# Altium PCB Main-Controller-PCB.PcbDoc
Units mm, origin at the board's own origin, x right, y up, seen from the top; angles counter-clockwise.
Board outline 96 x 40 mm, 2 copper layers (Top Layer, Bottom Layer); 19 components, 25 nets, 112 pads, 285 vias.
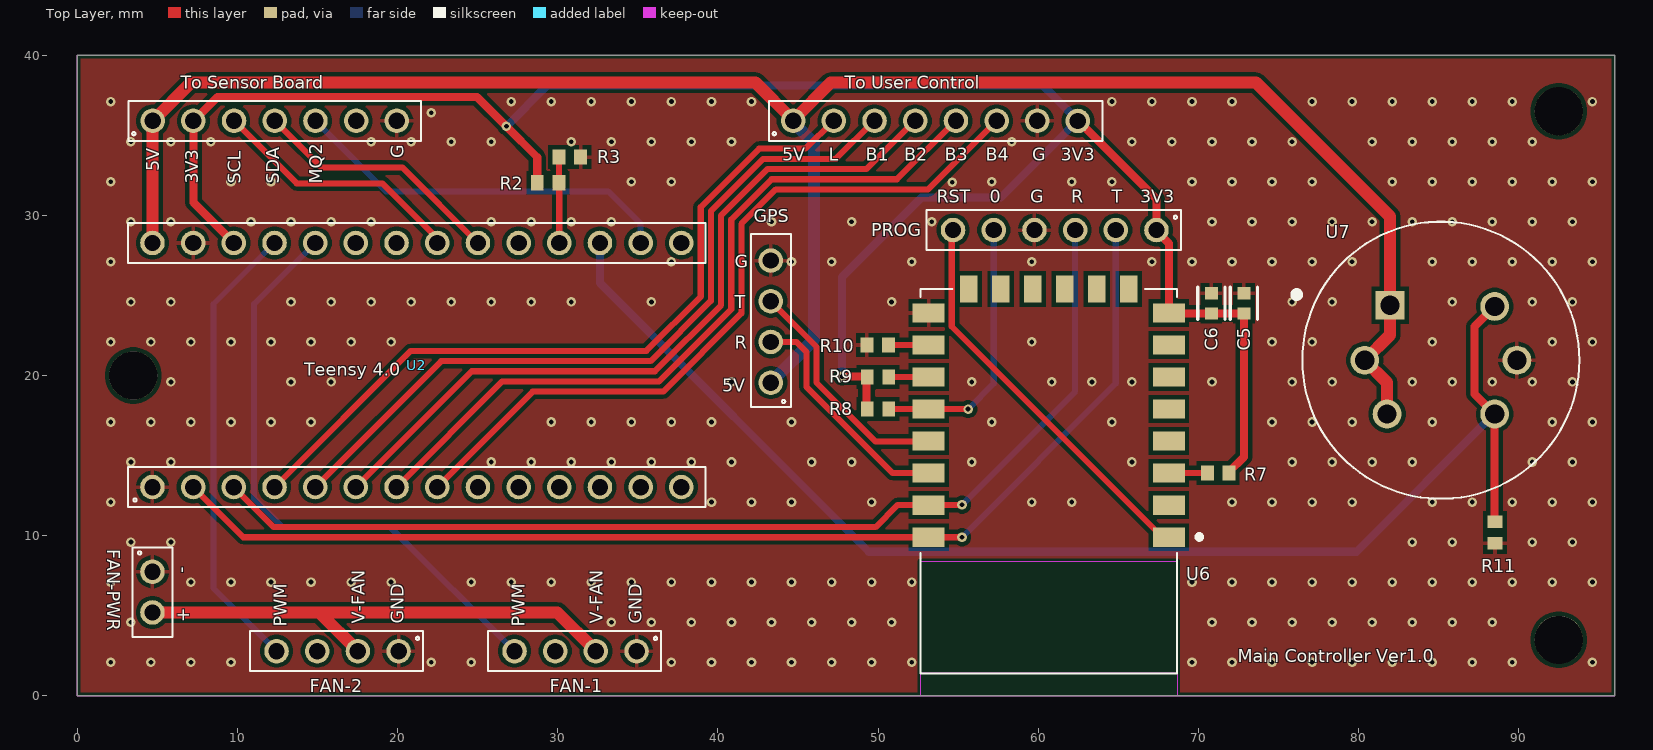
[diagram p0: Top Layer view]
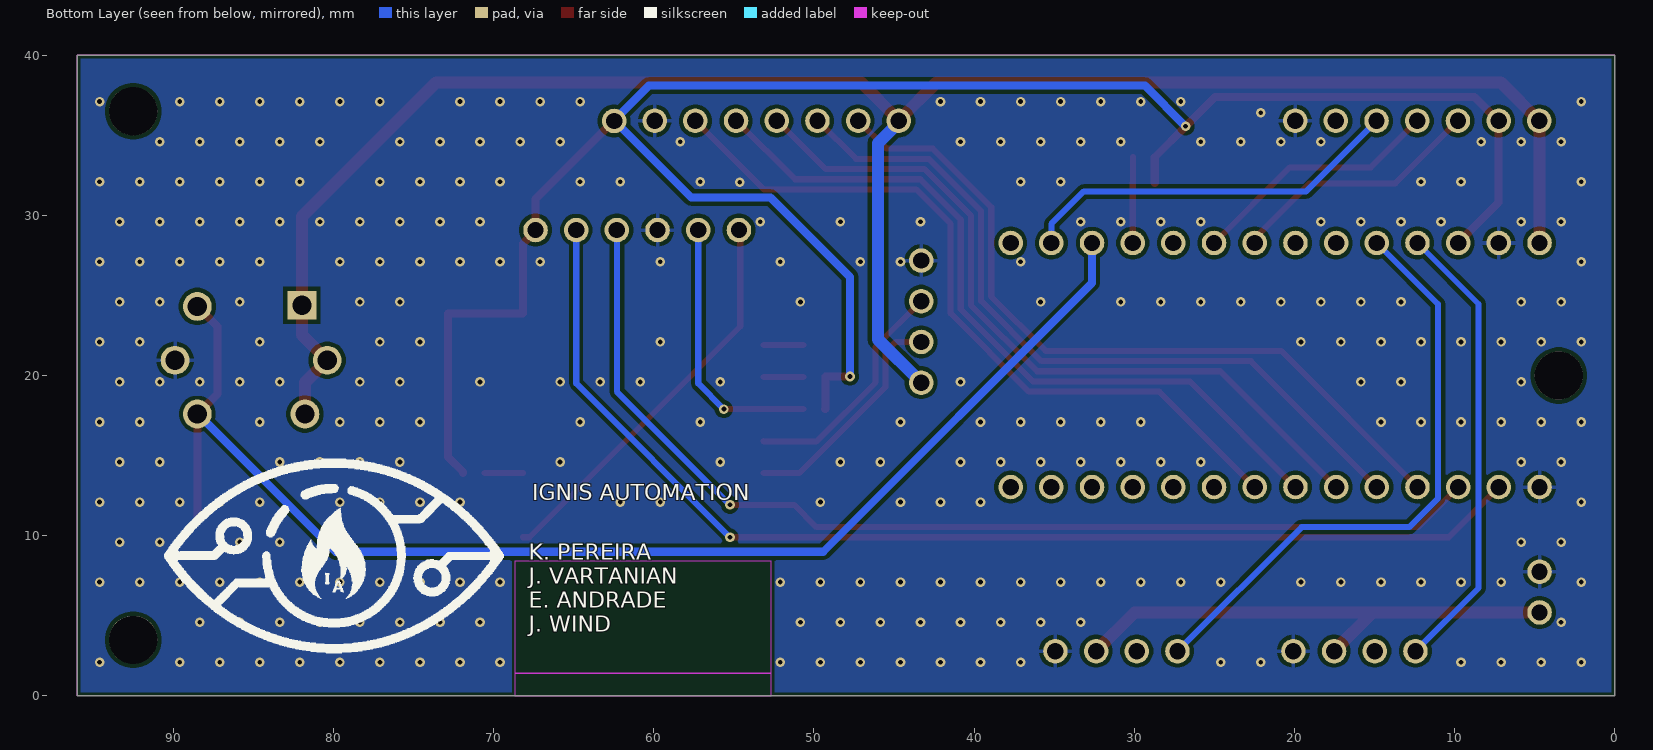
[diagram p1: Bottom Layer view, seen from below]

## Layer stack, top to bottom
Top Solder: solder mask 0.0102, Solder Resist, Dk 3.5
Top Layer: signal copper 0.0356
Dielectric 1: dielectric 0.32, FR-4, Dk 4.8
Bottom Layer: signal copper 0.0356
Bottom Solder: solder mask 0.0102, Solder Resist, Dk 3.5

## Board outline
0,0 0,40 96,40 96,0

## Design rules (kind name [scope] priority, off if disabled: settings)
Clearance Clearance_1 [InNamedPolygon('NONET_L-01_P-001') Or InNamedPolygon('NONET_L-01_P-001') vs OnLayer('Keep-Out Layer')] p1: gap=0.2 ignorepadtopadclearanceinfootprint=FALSE
Clearance [All] p2: gap=0.254 ignorepadtopadclearanceinfootprint=FALSE except(0: Arc-Hole Track-Hole SMDPad-Hole THPad-Hole Via-Hole Fill-Hole Poly-Hole Region-Hole Text-Hole)
HoleSize Via [IsVia] p1: absolutevalues=TRUE maxlimit=6.3 minlimit=0.3 maxpercent=80.000 minpercent=20.000
HoleSize [All] p2: absolutevalues=TRUE maxlimit=6.3 minlimit=0.2 maxpercent=80.000 minpercent=20.000
HoleToHoleClearance [All] p1: gap=0.5 allowstackedmicrovias=TRUE
MinimumAnnularRing [All] p1: minimumring=0.13
MinimumSolderMaskSliver [All] p1: minsoldermaskwidth=0.2
PolygonConnect [All] p1: connectstyle=Relief reliefconductorwidth=0.254 reliefentries=4 polygonreliefangle="90 Angle" airgapwidth=0.254
RoutingVias [All] p1: holewidth=0.711 width=1.27 viastyle="Through Hole" minholewidth=0.711 minwidth=1.27 maxholewidth=0.711 maxwidth=1.27
SilkToSolderMaskClearance [IsPad] p1: minsilkscreentomaskgap=0.15 clearancetoexposedcopper=TRUE
SolderMaskExpansion [All] p1: expansion=0.102 istentingtop=FALSE
Width [All] p1: maxlimit=1.016 minlimit=0.254 preferedwidth=0.381
26 further rules are at their usual default settings.

## Components (designator, comment, footprint, x,y, rotation, side; value= is the part's Value field where it differs from the comment)
C5 "10uF" FP-CL10-IPC_C 72.845,24.511 r90 top
C6 "1uF" FP-CL10-IPC_C 70.813,24.511 r90 top
FAN-1 "FAN-1" 61300711821#1 27.305,2.794 r180 top (schematic designator J2)
FAN-2 "FAN-2" 61300711821#1 12.446,2.794 r180 top (schematic designator J4)
FAN-PWR "Fan-PWR" 61300711821#2 4.699,0.127 r270 top (schematic designator J1)
GPS "GPS" 61300711821#1 43.307,27.178 r90 top (schematic designator J3)
PROG "PROG" 61300711821#3 59.764,29.083 r180 top (schematic designator J5)
R2 "10k" RESC1608X55X30NL15T15 29.401,32.036 r180 top
R3 "10k NTC" RESC1608X55X30NL15T15 30.754,33.642 r180 top
R7 "10k" RESC1608X55X30NL15T15 71.238,13.915 r180 top
R8 "10k" RESC1608X55X30NL15T15 49.996,17.903 r0 top
R9 "10k" RESC1608X55X30NL15T15 49.996,19.907 r0 top
R10 "10k" RESC1608X55X30NL15T15 49.983,21.905 r180 top
R11 "10k" RESC1608X55X30NL15T15 88.519,10.2 r90 top
"To Sensor Board" "To Sensor Board" 61300711821#4 12.333,35.9 r0 top (schematic designator J6)
"To User Control" "To User Control" 61300711821#5 52.324,35.9 r0 top (schematic designator J7)
U2 "Teensy4.0" 61301411821 4.699,13.036 r0 top
U6 "ESP8266-12E/ESP-12E" XCVR_ESP8266-12E/ESP-12E 60.66,16.906 r180 top
U7 "MQ-2" XDCR_SEN-08880 85.141,20.955 r0 top

## Footprints (in the part's own frame and the unit in brackets; to place one, negate y for a bottom-side part, rotate by r counter-clockwise, add the part's x,y. Pads: shape width x height; smd on the part's side, far side on the other; paste and mask are expansions set on the pad)
61300711821#1 [mm]
  round 1.53 hole 1.02: 1(-7.62,0) 2(-5.08,0) 3(-2.54,0) 4(0,0)
  silkscreen extent -9.14,-1.25 1.65,1.25, body extent -8.89,-1.23 1.27,1.27, height 10.54
61300711821#2 [mm]
  round 1.53 hole 1.02: 1(-7.62,0) 2(-5.08,0)
  silkscreen extent -9.14,-1.25 -3.56,1.25, body extent -8.89,-1.23 -3.81,1.27, height 10.54
61300711821#3 [mm]
  round 1.53 hole 1.02: 1(-7.62,0) 2(-5.08,0) 3(-2.54,0) 4(0,0) 5(2.54,0) 6(5.08,0)
  silkscreen extent -9.14,-1.25 6.73,1.25, body extent -8.89,-1.27 6.35,1.23, height 10.54
61300711821#4 [mm]
  round 1.53 hole 1.02: 1(-7.62,0) 2(-5.08,0) 3(-2.54,0) 4(0,0) 5(2.54,0) 6(5.08,0) 7(7.62,0)
  silkscreen extent -9.14,-1.25 9.14,1.25, body extent -9.14,-1.23 9.14,1.27, height 8.55
61300711821#5 [mm]
  round 1.53 hole 1.02: 1(-7.62,0) 2(-5.08,0) 3(-2.54,0) 4(0,0) 5(2.54,0) 6(5.08,0) 7(7.62,0) 8(10.155,-0.008)
  silkscreen extent -9.14,-1.25 11.68,1.25, body extent -8.9,-1.25 11.43,1.25, height 10.54
61301411821 [mm]
  round 1.53 hole 1.02: 1(0,0) 2(2.54,0) 3(5.08,0) 4(7.62,0) 5(10.16,0) 6(12.7,0) 7(15.24,0) 8(17.78,0) 9(20.32,0) 10(22.86,0) 11(25.4,0) 12(27.94,0) 13(30.48,0) 14(33.02,0) 15(33.02,15.24) 16(30.48,15.24) 17(27.94,15.24) 18(25.4,15.24) 19(22.86,15.24) 20(20.32,15.24) 21(17.78,15.24) 22(15.24,15.24) 23(12.7,15.24) 24(10.16,15.24) 25(7.62,15.24) 26(5.08,15.24) 27(2.54,15.24) 28(0,15.24)
  silkscreen extent -1.52,-1.25 34.54,16.49, body extent -2.46,-1.25 34.54,16.49, height 12.21
FP-CL10-IPC_C [mm]
  rect 0.758x0.812 smd paste+0 mask+0: 1(-0.627,0) 2(0.627,0)
  silkscreen extent -1.01,-0.85 1.01,0.85, body extent -1.11,-0.55 1.11,0.55, height 0.25
RESC1608X55X30NL15T15 [mm] "Chip Resistor, 2-Leads, Body 1.60x0.80mm, IPC Medium Density"
  rect 0.8x0.95 smd: 1(-0.675,0) 2(0.675,0)
  body extent -0.87,-0.48 0.87,0.48, height 0.55
XCVR_ESP8266-12E/ESP-12E [mm]
  rect 2x1.2 smd: 1(-7.5,7) 2(-7.5,5) 3(-7.5,3) 4(-7.5,1) 5(-7.5,-1) 6(-7.5,-3) 7(-7.5,-5) 8(-7.5,-7) 15(7.5,-7) 16(7.5,-5) 17(7.5,-3) 18(7.5,-1) 19(7.5,1) 20(7.5,3) 21(7.5,5) 22(7.5,7)
  rect 1.1x1.7 smd: 9(-5,-8.5) 10(-3,-8.5) 11(-1,-8.5) 12(1,-8.5) 13(3,-8.5) 14(5,-8.5)
  Keep-Out Layer region: 8,8.51 -8.009,8.51 -8.009,15.5 8,15.5
  Keep-Out Layer region: 8,8.51 -8.009,8.51 -8.009,15.5 8,15.5
  silkscreen extent -9.5,-8.5 8,15.5, body extent -8,-8.44 8,15.56, height 3
XDCR_SEN-08880 [mm]
  rect 1.8x1.8 hole 1.2: 1(-3.175,3.429)
  round 1.8 hole 1.2: 2(-4.75,0) 3(-3.359,-3.359) 4(3.359,-3.359) 5(4.75,0) 6(3.359,3.359)
  silkscreen extent -9.2,-8.65 8.65,8.65, body extent -7.5,-7.25 7,7.25, height 10.5

## Part data
C5: library part CMP-13271-003248-1, "Cap Ceramic 10uF 10V X5R ±20% Pad SMD 0603 +85°C T/R", Case Code (Imperial)=0603, Case Code (Metric)=1608, Dielectric=X5R, Max Operating Temperature=85°C, Min Operating Temperature=-55°C, Package Quantity=1, Tolerance=20%, Voltage Rating=10V, Capacitance=10uF, Case/Package=0603, Contact Plating=Tin, Depth=0.8mm, Height=0.8mm, Lead Free="Lead Free", Length=1.6mm, Mount="Surface Mount", Packaging="Tape and Reel", Radiation Hardening=No, Thickness=0.035inch, Voltage Rating (DC)=10V, Width=0.031inch
C6: library part CMP-13271-003248-1, "Cap Ceramic 10uF 10V X5R ±20% Pad SMD 0603 +85°C T/R", Capacitance=10uF, Case Code (Imperial)=0603, Case Code (Metric)=1608, Dielectric=X5R, Max Operating Temperature=85°C, Min Operating Temperature=-55°C, Package Quantity=1, Tolerance=20%, Voltage Rating=10V, Case/Package=0603, Contact Plating=Tin, Depth=0.8mm, Height=0.8mm, Lead Free="Lead Free", Length=1.6mm, Mount="Surface Mount", Packaging="Tape and Reel", Radiation Hardening=No, Thickness=0.035inch, Voltage Rating (DC)=10V, Width=0.031inch
FAN-1 FAN-2 GPS: library part 61300711821, "4 Pin"
FAN-PWR: library part 61300711821, "2 Pin"
PROG: library part 61300711821, "6 Pin"
R2 R3 R7 R8 R9 R10 R11: library part CMP-2000-00180-1, Manufacturer=Panasonic, Part Number=ERJ-3EKF1001V
"To Sensor Board": library part 61300711821, "7 Pin"
"To User Control": library part 61300711821, "Single Row / Straight / Without Shroud Female header Female 7", Package=None, Availability=Unavailable, Check_prices=https://www.snapeda.com/parts/61300711821/W%C3%BCrth%20Elektronik/view-part/2704590/?ref=eda, MF="WÃ¼rth Elektronik", MP=61300711821, Price=None, SnapEDA_Link=https://www.snapeda.com/parts/61300711821/W%C3%BCrth%20Elektronik/view-part/2704590/?ref=snap
U6: "ESP8266"
U7: "MQ-2 Gas Sensor"

## Free pads (board coordinates)
  round 3 hole 3 unplated: ""(3.5,20) ""(92.5,3.5) ""(92.5,36.5)

## Via types
v1: diameter 0.6, hole 0.3, Top Layer to Bottom Layer, tented both sides, 285 vias

## Nets (pads, with @x,y where several pads share a name; then routed paths per layer and width w, separated by ;. In a path a pad name is that pad's centre, name@x,y a point inside that pad or via, vN(x,y) a via of type N, cw(c..) or ccw(c..) an arc to the next point about the centre after c; other vN are vias at no path point)
3V3: "To Sensor Board.2" "To User Control.8" C5.1 C6.1 PROG.1 R2.2 R7.1 R8.1 R9.1 U2.26 U6.8 | length 129.6
  Top Layer w0.5: v1(47.752,19.939) 49.289,19.939 49.276,19.926 49.276,17.907 49.28,17.903 R8.1 ; 62.479,35.892 62.52,35.892 67.384,31.028 PROG.1 67.384,29.014 68.16,28.238 U6.8 68.182,23.884 C6.1 C5.1 72.845,14.922 71.913,13.99 R7.1
  Top Layer w0.508: U2.26 7.253,30.801 7.253,35.9 8.753,37.4 24.957,37.4 v1(26.797,35.56) 28.726,33.631 R2.2
  Bottom Layer w0.508: v1(26.797,35.56) 29.337,38.1 60.312,38.1 62.479,35.933 62.479,35.892 62.438,35.892 57.661,31.116 52.706,31.116 47.752,26.162 v1(47.752,19.939)
5V: "To Sensor Board.1" "To User Control.1" GPS.1 U2.28 U7.1 U7.2 U7.3 | length 122.9
  Top Layer w0.762: U2.28 4.706,28.283 4.706,35.893 4.713,35.9 7.102,38.289 42.356,38.289 44.704,35.941 ; 44.704,35.9 44.704,35.941 ; U7.3 81.782,19.564 U7.2 81.966,22.53 U7.1 81.966,29.921 73.598,38.289 47.052,38.289 44.704,35.941
  Bottom Layer w0.762: GPS.1 46,22.251 46,34.498 44.704,35.794 44.704,35.9
BTN1: "To User Control.3" U2.5 | length 47.7
  Top Layer w0.381: U2.5 22.728,20.905 35.803,20.905 39.563,24.665 39.563,30.258 42.834,33.528 47.371,33.528 49.763,35.92
BTN2: "To User Control.4" U2.6 | length 47.7
  Top Layer w0.381: U2.6 24.633,20.27 36.066,20.27 40.198,24.402 40.198,29.995 43.097,32.893 49.276,32.893 52.303,35.92
BTN3: "To User Control.5" U2.7 | length 47.7
  Top Layer w0.381: U2.7 26.538,19.635 36.329,19.635 40.833,24.139 40.833,29.732 43.36,32.258 51.181,32.258 54.843,35.92
BTN4: "To User Control.6" U2.8 | length 47.7
  Top Layer w0.381: U2.8 28.443,19 36.592,19 41.468,23.876 41.468,29.468 43.623,31.623 53.127,31.623 57.404,35.9
FAN1: FAN-1.4 U2.24 | length 37.7
  Bottom Layer w0.381: U2.24 11.049,24.466 11.049,12.319 12.827,10.541 19.558,10.541 FAN-1.4
FAN2: FAN-2.4 U2.25 | length 28.7
  Bottom Layer w0.381: U2.25 8.509,24.466 8.509,6.731 FAN-2.4
Fan-PWR: FAN-1.2 FAN-2.2 FAN-PWR.2 | length 32.1
  Top Layer w0.762: FAN-PWR.2 15.113,5.207 ; FAN-2.2 15.113,5.207 ; FAN-1.2 29.972,5.207 15.113,5.207
GND: "To Sensor Board.7" "To User Control.7" C5.2 C6.2 FAN-1.1 FAN-2.1 FAN-PWR.1 GPS.4 PROG.4 R3.1 R10.2 R11.1 U2.1 U2.27 U6.15 U7.5
  other v1: 2.1,2.1 4.6,2.1 7.1,2.1 9.6,2.1 22.1,2.1 24.6,2.1 37.1,2.1 39.6,2.1 42.1,2.1 44.6,2.1 47.1,2.1 49.6,2.1 52.1,2.1 69.6,2.1 72.1,2.1 74.6,2.1 77.1,2.1 79.6,2.1 82.1,2.1 84.6,2.1 87.1,2.1 89.6,2.1 94.6,2.1 3.35,4.6 33.35,4.6 35.85,4.6 38.35,4.6 40.85,4.6 43.35,4.6 45.85,4.6 48.35,4.6 50.85,4.6 70.85,4.6 73.35,4.6 75.85,4.6 78.35,4.6 80.85,4.6 83.35,4.6 85.85,4.6 88.35,4.6 2.1,7.1 7.1,7.1 9.6,7.1 12.1,7.1 14.6,7.1 17.1,7.1 19.6,7.1 24.6,7.1 27.1,7.1 29.6,7.1 32.1,7.1 34.6,7.1 37.1,7.1 39.6,7.1 42.1,7.1 44.6,7.1 47.1,7.1 49.6,7.1 52.1,7.1 69.6,7.1 72.1,7.1 74.6,7.1 77.1,7.1 79.6,7.1 82.1,7.1 84.6,7.1 87.1,7.1 89.6,7.1 92.1,7.1 94.6,7.1 3.35,9.6 5.85,9.6 83.35,9.6 85.85,9.6 90.85,9.6 93.35,9.6 2.1,12.1 39.6,12.1 42.1,12.1 44.6,12.1 49.6,12.1 59.6,12.1 62.1,12.1 72.1,12.1 74.6,12.1 77.1,12.1 79.6,12.1 84.6,12.1 87.1,12.1 89.6,12.1 92.1,12.1 94.6,12.1 3.35,14.6 5.85,14.6 25.85,14.6 28.35,14.6 30.85,14.6 33.35,14.6 35.85,14.6 38.35,14.6 40.85,14.6 45.85,14.6 48.35,14.6 55.85,14.6 65.85,14.6 75.85,14.6 78.35,14.6 80.85,14.6 83.35,14.6 90.85,14.6 93.35,14.6 2.1,17.1 4.6,17.1 7.1,17.1 9.6,17.1 12.1,17.1 14.6,17.1 29.6,17.1 32.1,17.1 34.6,17.1 37.1,17.1 39.6,17.1 44.6,17.1 57.1,17.1 64.6,17.1 74.6,17.1 77.1,17.1 79.6,17.1 84.6,17.1 92.1,17.1 94.6,17.1 5.85,19.6 13.35,19.6 15.85,19.6 40.85,19.6 55.85,19.6 60.85,19.6 63.35,19.6 65.85,19.6 70.85,19.6 75.85,19.6 78.35,19.6 83.35,19.6 85.85,19.6 88.35,19.6 90.85,19.6 93.35,19.6 2.1,22.1 4.6,22.1 7.1,22.1 9.6,22.1 12.1,22.1 14.6,22.1 17.1,22.1 19.6,22.1 59.6,22.1 74.6,22.1 77.1,22.1 84.6,22.1 92.1,22.1 94.6,22.1 3.35,24.6 5.85,24.6 13.35,24.6 15.85,24.6 18.35,24.6 20.85,24.6 23.35,24.6 25.85,24.6 28.35,24.6 30.85,24.6 35.85,24.6 50.85,24.6 75.85,24.6 78.35,24.6 85.85,24.6 90.85,24.6 93.35,24.6 2.1,27.1 37.1,27.1 44.6,27.1 47.1,27.1 52.1,27.1 59.6,27.1 67.1,27.1 69.6,27.1 72.1,27.1 74.6,27.1 77.1,27.1 79.6,27.1 84.6,27.1 87.1,27.1 89.6,27.1 92.1,27.1 94.6,27.1 3.35,29.6 5.85,29.6 10.85,29.6 13.35,29.6 15.85,29.6 18.35,29.6 25.85,29.6 28.35,29.6 30.85,29.6 33.35,29.6 43.35,29.6 48.35,29.6 53.35,29.6 70.85,29.6 73.35,29.6 75.85,29.6 78.35,29.6 80.85,29.6 83.35,29.6 85.85,29.6 88.35,29.6 90.85,29.6 93.35,29.6 54.628,32.072 2.1,32.1 9.6,32.1 12.1,32.1 34.6,32.1 37.1,32.1 57.1,32.1 62.1,32.1 64.6,32.1 69.6,32.1 72.1,32.1 74.6,32.1 77.1,32.1 82.1,32.1 84.6,32.1 87.1,32.1 89.6,32.1 92.1,32.1 94.6,32.1 3.35,34.6 5.85,34.6 8.35,34.6 18.35,34.6 20.85,34.6 23.35,34.6 25.85,34.6 30.85,34.6 33.35,34.6 35.85,34.6 38.35,34.6 40.85,34.6 58.35,34.6 65.85,34.6 68.35,34.6 70.85,34.6 73.35,34.6 75.85,34.6 80.85,34.6 83.35,34.6 85.85,34.6 88.35,34.6 90.85,34.6 22.1,36.403 2.1,37.1 27.1,37.1 29.6,37.1 32.1,37.1 34.6,37.1 37.1,37.1 39.6,37.1 42.1,37.1 64.6,37.1 67.1,37.1 69.6,37.1 72.1,37.1 77.1,37.1 79.6,37.1 82.1,37.1 84.6,37.1 87.1,37.1 89.6,37.1 94.6,37.1
GPS-RX: GPS.2 U6.20 | length 14.5
  Top Layer w0.381: GPS.2 44.902,22.098 45.522,21.478 45.522,19.301 50.917,13.906 U6.20
GPS-TX: GPS.3 U6.19 | length 14.8
  Top Layer w0.381: GPS.3 46.157,21.788 46.157,19.564 49.846,15.875 53.129,15.875 U6.19
IO0: PROG.5 R8.2 U6.18 | length 16.8
  Top Layer w0.381: R8.2 50.674,17.906 U6.18 v1(55.626,17.907) v1(55.626,17.907)
  Bottom Layer w0.381: v1(55.626,17.907) 57.224,19.505 PROG.5
LED: "To User Control.2" U2.4 | length 47.7
  Top Layer w0.381: U2.4 20.823,21.54 35.54,21.54 38.928,24.928 38.928,30.521 42.571,34.163 45.466,34.163 47.223,35.92
MQ2-Inside: R11.2 U2.17 U7.4 U7.6 | length 83.3
  Top Layer w0.508: U7.6 87.249,23.063 87.249,18.847 U7.4 88.5,10.894 R11.2
  Bottom Layer w0.508: U2.17 32.639,25.781 49.42,9 79.866,9 88.462,17.596 U7.4
MQ2-Outside: "To Sensor Board.5" U2.16 | length 24.2
  Bottom Layer w0.381: 14.873,35.9 19.277,31.496 33.147,31.496 35.179,29.464 U2.16
NetR7_2: R7.2 U6.3 | length 2.4
  Top Layer w0.381: U6.3 70.554,13.906 R7.2
NetR9_2: R9.2 U6.17 | length 2.5
  Top Layer w0.381: R9.2 U6.17
NetR10_1: R10.1 U6.16 | length 2.5
  Top Layer w0.381: R10.1 U6.16
NTC-IN: R2.1 R3.2 U2.18 | length 5.4
  Top Layer w0.381: R3.2 30.079,32.039 R2.1 30.099,32.013 U2.18
RST: PROG.6 U6.1 | length 25.1
  Top Layer w0.381: PROG.6 54.605,29.004 54.605,23.062 67.76,9.906 U6.1
RXD: PROG.3 U2.3 U6.21 | length 67.1
  Top Layer w0.381: U2.3 12.274,10.541 49.845,10.541 51.21,11.906 U6.21 55.213,11.906 v1(55.245,11.938)
  Bottom Layer w0.381: v1(55.245,11.938) 62.304,18.997 PROG.3
SCL: "To Sensor Board.3" U2.21 | length 16
  Top Layer w0.381: 9.793,35.9 13.693,32 19.054,32 22.479,28.575 U2.21
SDA: "To Sensor Board.4" U2.20 | length 15.8
  Top Layer w0.381: 12.333,35.9 15.233,33 20.295,33 U2.20
TXD: PROG.2 U2.2 U6.22 | length 72.5
  Top Layer w0.381: U2.2 10.369,9.906 U6.22 v1(55.245,9.906)
  Bottom Layer w0.381: v1(55.245,9.906) 64.844,19.505 PROG.2
pads on no net: "To Sensor Board.6" FAN-1.3 FAN-2.3 U2.9 U2.10 U2.11 U2.12 U2.13 U2.14 U2.15 U2.19 U2.22 U2.23 U6.2 U6.4 U6.5 U6.6 U6.7 U6.9 U6.10 U6.11 U6.12 U6.13 U6.14

## Polygon pours and split planes (outlines as drawn)
GND on Top Layer "NONET_L-01_P-001" (solid, pour order 1): 0,0 0,39.999 95.999,40 96,-0.002
GND on Bottom Layer "NONET_L-01_P-001" (solid, pour order 0): 0,-0.001 -0.003,40.004 95.999,40.001 96,0

## Keep-outs
Keep-Out Layer:
  region: 52.66,1.406 68.669,1.406 68.669,0.009 68.66,0 52.66,0
  lines w0.025: 0,0 96,0 96,40 0,40 0,0

## Silkscreen, mask and mechanical layers (free items; w line width, h text height)
Top Overlay:
  text "G" at 20.374,33.567 h0.8 r90
  text "5V" at 44.015,33.4 h0.8
  text "L" at 46.936,33.4 h0.8
  text "B1" at 49.222,33.4 h0.8
  text "B2" at 51.635,33.4 h0.8
  text "B3" at 54.175,33.4 h0.8
  text "B4" at 56.715,33.4 h0.8
  text "G" at 59.636,33.4 h0.8
  text "3V3" at 61.414,33.4 h0.8
  text "5V" at 5.134,32.767 h0.8 r90
  text "3V3" at 7.547,31.967 h0.8 r90
  text "SCL" at 10.214,31.967 h0.8 r90
  text "SDA" at 12.627,31.967 h0.8 r90
  text "MQ2" at 15.294,31.967 h0.8 r90
  text "RST" at 53.667,30.8 h0.8
  text "0" at 56.969,30.8 h0.8
  text "G" at 59.509,30.8 h0.8
  text "R" at 62.049,30.8 h0.8
  text "T" at 64.589,30.8 h0.8
  text "3V3" at 66.367,30.8 h0.8
  text "G" at 41.067,26.743 h0.8
  text "T" at 41.067,24.203 h0.8
  text "R" at 41.067,21.663 h0.8
  text "5V" at 40.267,18.996 h0.8
  text "V-FAN" at 17.961,4.518 h0.8 r90
  text "GND" at 20.374,4.518 h0.8 r90
  text "V-FAN" at 32.82,4.518 h0.8 r90
  text "GND" at 35.233,4.518 h0.8 r90
  text "PWM" at 13.081,4.318 h0.8 r90
  text "PWM" at 27.94,4.318 h0.8 r90
  text "Main Controller Ver1.0" at 72.463,2.105 h0.8
Bottom Overlay:
  drawing of 6 lines, arcs and shapes, not listed
  text "IGNIS AUTOMATION" at 67.6,12.2 h1
  text "K. PEREIRA / J. VARTANIAN / E. ANDRADE / J. WIND" at 67.8,4 h1
Mechanical 1:
  the board outline again, w0.025

## Text inside footprints (layer, text, board x,y; h text height)
FAN-PWR: Top Overlay "+" at 6.29,5.515 h0.8 r270; Top Overlay "-" at 6.277,8.055 h0.8 r270
U2: Top Overlay "Teensy 4.0" at 14.17,19.979 h0.8